# Altium PCB HT82V72_DEMOBOARD_V1_1.PcbDoc (part 2 of 2)
Units mil, origin at the board's own origin, x right, y up, seen from the top; angles counter-clockwise.
Board outline 2755.91 x 2047.24 mil, 4 copper layers (Top, 2-GND, 3-POWER, Bottom), stack 35.4 mil thick; 149 components, 103 nets, 424 pads, 256 vias.
Unrouted connection lines stored in the file: 3.
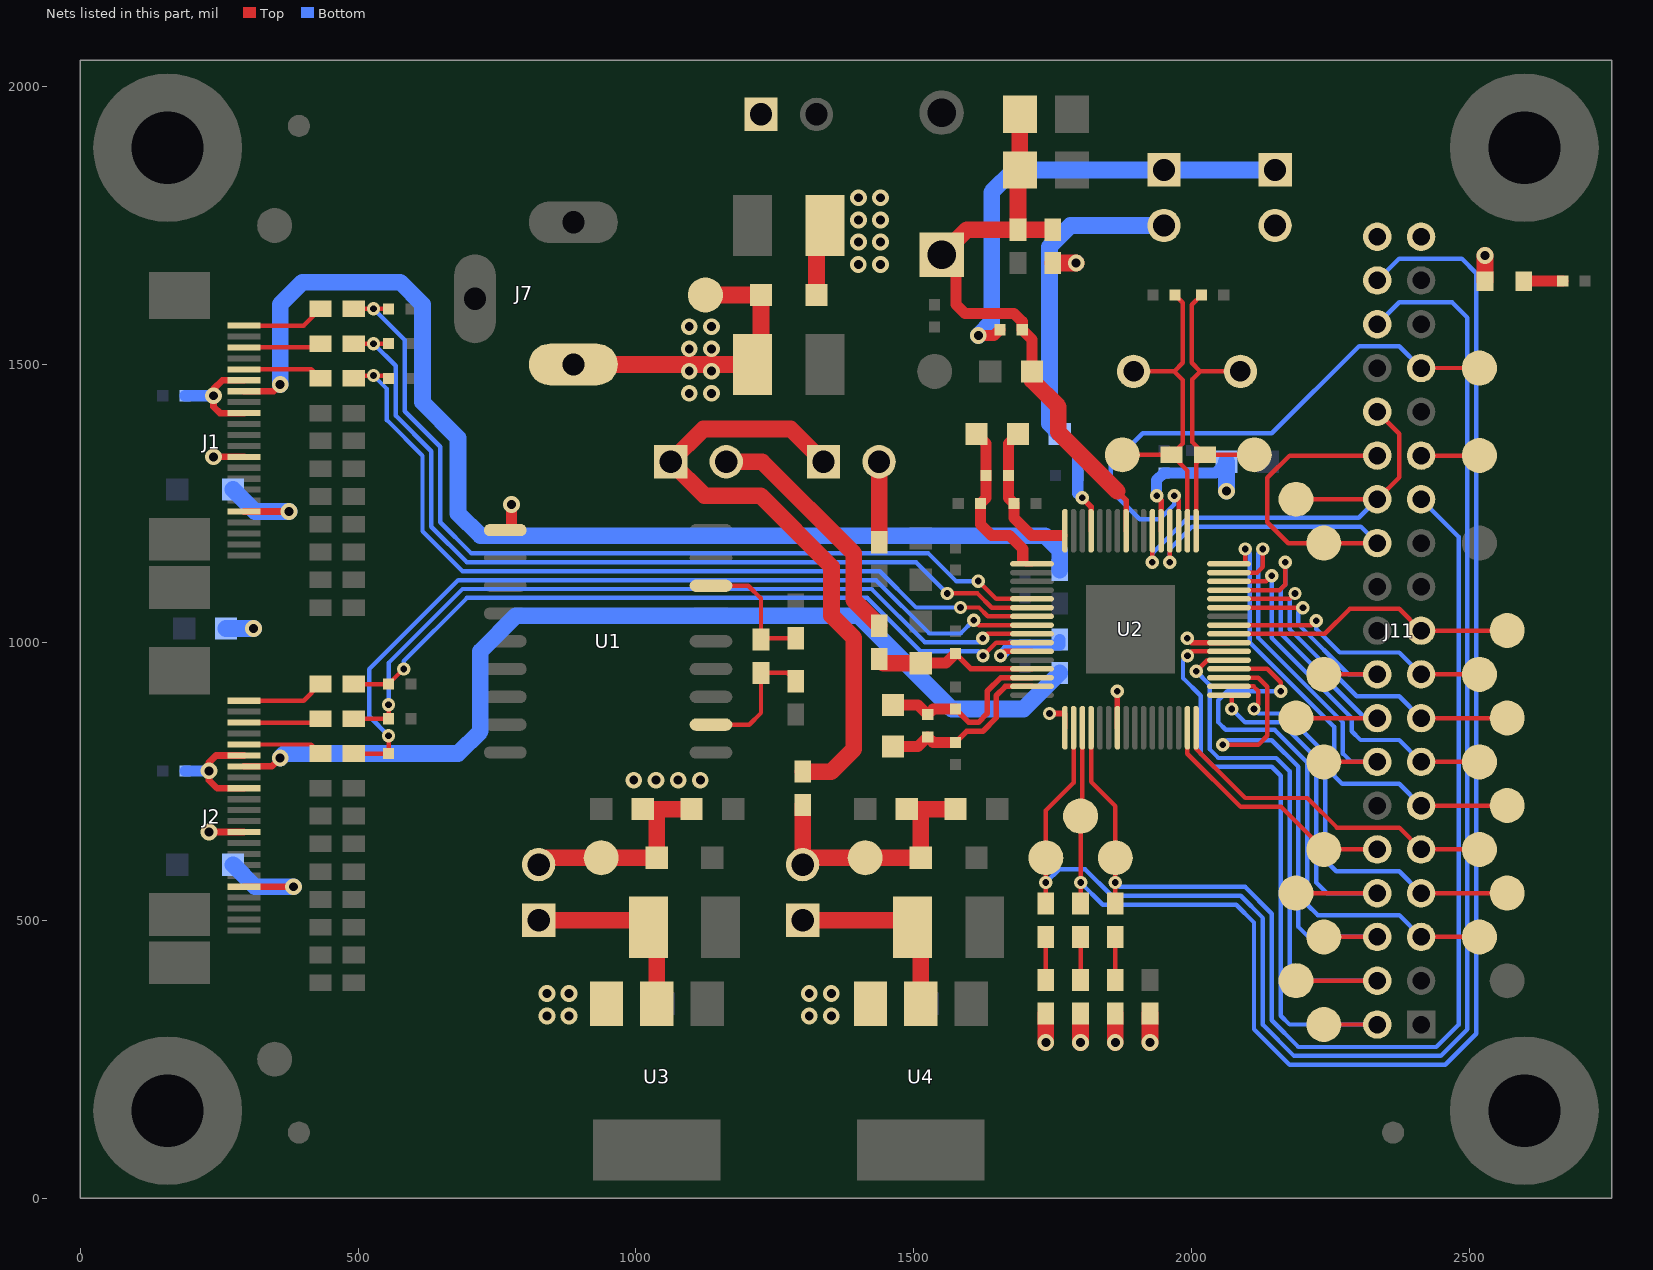
[diagram p4: the nets of this part, all layers, seen from the top]

## Via types
v1: diameter 24, hole 12, Top to Bottom, 140 vias
v2: diameter 30, hole 16, Top to Bottom, 116 vias

## Nets (pads, with @x,y where several pads share a name; then routed paths per layer and width w, separated by ;. In a path a pad name is that pad's centre, name@x,y a point inside that pad or via, vN(x,y) a via of type N, cw(c..) or ccw(c..) an arc to the next point about the centre after c; other vN are vias at no path point) (continued)
N16946003: C21.1 C22.1 L3.1 U2.61 | length 296.9
  Top w10: C22.1@1575,980 1602.72,952.28 U2.61@1712.6,952.28
  Top w20: C21.1@1512.5,962.6 1557.6,962.6 C22.1@1575,980
  Top w30: L3.1@1437.5,970 1444.9,962.6 C21.1@1512.5,962.6
N16948879: C7.2 C8.2 C9.1 U2.49 | length 308.6
  Top w10: 1696,1147 1701.74,1141.26 U2.49@1712.6,1141.26
  Top w20: C7.2@1612.6,1375 1630,1357.6 C8.2@1630,1300 1630,1260 C9.1@1620,1250 1620,1212 1640,1192 1672,1192 1696,1168 1696,1147
N16948881: C6.1 C7.1 C8.1 U2.48 | length 276.1
  Top w8: 1766.42,1191.97 1771.65,1191.97 U2.48@1771.65,1200.79
  Top w20: C7.1@1687.4,1375 1670,1357.6 C8.1@1670,1300 1670,1260 C6.1@1680,1250 1680,1224 1712.03,1191.97 1766.42,1191.97
N16949181: C10.1 C11.1 C12.1 U2.62 | length 328.2
  Top w10: C10.1@1575,880 1599,856 1616,856 1632,872 1632,912 1656.54,936.54 U2.62@1712.6,936.54
  Top w20: C11.1@1462.5,887.4 1507.6,887.4 C12.1@1525,870 1535,880 C10.1@1575,880
N16949187: C11.2 C12.2 C13.1 U2.63 | length 326.6
  Top w10: C13.1@1575,820 1595,840 1624,840 1648,864 1648,904 1664.79,920.79 U2.63@1712.6,920.79
  Top w20: C11.2@1462.5,812.6 1507.6,812.6 C12.2@1525,830 1535,820 C13.1@1575,820
N16949961: C18.1 R13.1 U2.59 | length 184.4
  Top w10: v1(1656,975.78) 1664,983.78 U2.59@1712.6,983.78
  Bottom w20: v1(1656,975.78) 1675.22,995 C18.1@1700,995 1762.5,995 R13.1@1762.5,1005
N16958578: LED1.2 R34.1 | length 70
  Top w20: LED1.2@2597.5,1650 R34.1@2667.5,1650
N16977037: J6.2 L3.2 | length 446.7
  Top w30: J6.2@1162.5,1325 1227,1325 1392,1160 1392,1075.5 L3.2@1437.5,1030
N16977040: J4.2 L2.2 | length 145
  Top w30: L2.2@1437.5,1180 J4.2@1437.5,1325
N16987505: R24.1 R33.2 | length 77.5
  Top w8: R24.1@1862.5,392.5 R33.2@1862.5,470
N16987621: R26.1 R31.2 | length 77.5
  Top w8: R26.1@1737.5,392.5 R31.2@1737.5,470
N16987626: R25.1 R32.2 | length 77.5
  Top w8: R25.1@1800,392.5 R32.2@1800,470
N16990104: C40.1 J8.1 U3.2 | length 355.2
  Top w30: J8.1@825,500 1010,500 C40.1@1022.5,487.5 1037.5,487.5 U3.2@1037.5,350
N16992961: J11.27 TP15.1 | length 129.7
  Top w8: J11.27@2412.5,1336.12 2529.87,1336.12 TP15.1@2517.5,1336.25
N16994401: C43.1 J10.1 U4.2 | length 362.5
  Top w30: J10.1@1300,500 1497.5,500 C43.1@1497.5,487.5 1512.5,487.5 U4.2@1512.5,350
N16995313: C32.1 R27.1 TP10.1 U2.33 Y1.1 | length 620.4
  Top w8: U2.33@2007.87,1200.79 2007.87,1321.62 R27.1@2023.75,1337.5 ; C32.1@2017.5,1625 2000,1607.5 2000,1503 2015.5,1487.5 ; Y1.1@2087.5,1487.5 2015.5,1487.5 ; TP10.1@2112.5,1337.5 R27.1@2023.75,1337.5 ; 2015.5,1487.5 2001.25,1473.25 2001.25,1360 R27.1@2023.75,1337.5
N16995318: C33.1 R27.2 TP11.1 U2.34 Y1.2 | length 624.9
  Top w8: TP11.1@1875,1337.5 R27.2@1963.75,1337.5 ; Y1.2@1895.37,1487.5 1968.5,1487.5 ; C33.1@1970,1625 1984,1611 1984,1503 1968.5,1487.5 ; U2.34@1992.13,1200.79 1992.13,1309.12 R27.2@1963.75,1337.5 ; R27.2@1963.75,1337.5 1984,1357.75 1984,1472 1968.5,1487.5
N17014977: R35.1 R37.1 U1.2 | length 239.4
  Top w8: U1.2@1135.04,851.97 1203.97,851.97 1225,873 R37.1@1225,945 1272.5,945 R35.1@1287.5,930
N17014985: R36.1 R37.2 U1.7 | length 237
  Top w8: U1.7@1135.04,1101.97 1202.03,1101.97 1225,1079 R37.2@1225,1005 1227.5,1007.5 R36.1@1287.5,1007.5
PVDD_3V3: C27.1 C29.1 C30.1 C31.1 J5.2 R23.1 R24.2 R25.2 R26.2 U2.7 U2.23 U2.37 | length 682.6
  Top w10: U2.7@1866.14,846.46 v1(1866.14,912) ; v1(1936.88,1264) 1944.88,1256 U2.37@1944.88,1200.79 ; v1(1992,1007.53) 2000,999.53 U2.23@2066.93,999.53
  Top w30: v2(1737.5,280) R26.2@1737.5,332.5 ; R23.1@1750,1682.5 v2(1792,1682.5) ; v2(1800,280) R25.2@1800,332.5 ; v2(1862.5,280) R24.2@1862.5,332.5 ; v2(1925,280) C27.1@1925,332.5
  Bottom w20: v1(1936.88,1264) 1936.88,1291.88 C31.1@1950,1305 C30.1@2000,1305 2042.6,1305 C29.1@2062.6,1325
  Bottom w30: v2(2062.6,1272) C29.1@2062.6,1325
PVDDREG_3V3: C25.1 C26.1 J3.2 U2.45 | length 764
  Top w10: v1(1802.9,1260) 1818.9,1244 U2.45@1818.9,1200.79
  Bottom w20: C25.1@1762.4,1375 1795,1342.4 C26.1@1795,1300 1795,1267.9 v1(1802.9,1260)
  Bottom w30: C25.1@1762.4,1375 1744,1393.4 1744,1712 1782,1750 J3.2@1950,1750
ROLLER_OUT: J11.25 R33.1 TP8.1 U2.4 | length 2177
  Top w8: U2.4@1818.9,846.46 1818.9,749.1 1862.5,705.5 TP8.1@1862.5,612.5 v1(1862.5,568) R33.1@1862.5,530
  Bottom w8: v1(1862.5,568) 1870.5,560 2096,560 2144,512 2144,320 2192,272 2440,272 2480,312 2480,1189.88 J11.25@2412.5,1257.38
RSTN: C24.1 C28.1 D2.1 D3.1 R14.2 R23.2 SW1.1 U2.41 | length 1112.9
  Top w10: 1865.89,1272 1881.89,1256 U2.41@1881.89,1200.79
  Top w20: SW1.1@1550,1697.05 1576,1671.05 1576,1608 1592,1592 1680,1592 1695,1577 R14.2@1695,1562.5 1712.4,1545.1 C24.1@1712.4,1487.5
  Top w30: SW1.1@1550,1697.05 1595.45,1742.5 C28.1@1687.5,1742.5 ; D3.1@1690.65,1950 D2.1@1690.65,1850 1687.5,1846.85 C28.1@1687.5,1742.5 ; C24.1@1712.4,1487.5 1712.4,1471.6 1760,1424 1760,1377.89 1865.89,1272 ; R23.2@1750,1742.5 C28.1@1687.5,1742.5
VCC_3V3: C3.1 C4.1 C5.1 C41.1 C45.1 C46.1 J1.6 J1.9 J2.6 J2.9 J3.1 J5.1 J8.2 R14.1 TP13.1 U2.1 | length 1750.2
  Top w10: v1(1744,872) 1771.65,872 U2.1@1771.65,846.46
  Top w12: J2.9@295,737.51 246.49,737.51 232,752 v2(232,768.75) 232,784 244.57,796.57 J2.6@295,796.57 ; J1.9@295,1412.51 251.49,1412.51 240,1424 v2(240,1443.75) 240,1455.57 256,1471.57 J1.6@295,1471.57
  Top w20: v2(1616,1552) 1644.5,1552 R14.1@1655,1562.5
  Top w30: J8.2@825,600 837.5,612.5 TP13.1@937.5,612.5 C41.1@1037.5,612.5 1037.5,700 ; C46.1@1012.4,700 1037.5,700 ; C45.1@1100.1,700 1037.5,700
  Bottom w20: C5.1@188.75,768.75 v2(232,768.75) ; C4.1@188.75,1443.75 v2(240,1443.75)
  Bottom w30: C3.1@262.4,1025 v2(312,1025) ; v2(1616,1552) 1640,1576 1640,1810 1680,1850 J3.1@1950,1850 J5.1@2150,1850
  other v2: 996.1,752.19 1036.07,752.19 1076.04,752.19 1116.01,752.19
VCC_3V3_AVDD: C44.1 C47.1 C48.1 J10.2 L1.2 TP14.1 | length 500.4
  Top w30: L1.2@1300,707.5 J10.2@1300,600 1312.5,612.5 TP14.1@1412.5,612.5 C44.1@1512.5,612.5 1512.5,700 ; C48.1@1487.4,700 1512.5,700 ; C47.1@1575.1,700 1512.5,700
VCC_3V3A: J4.1 J6.1 L1.1 | length 1145
  Top w30: L1.1@1300,767.5 1351.5,767.5 1392,808 1392,1008 1352,1048 1352,1136 1224,1264 1123.5,1264 J6.1@1062.5,1325 1121.5,1384 1278.5,1384 J4.1@1337.5,1325
VCC_5V: C1.2 C2.2 C37.1 C38.1 C42.1 D1.1 J1.13 J1.18 J2.13 J2.18 J11.37 J11.38 LED1.1 U1.10 U3.3 U4.3 | length 765.1
  Top w12: v2(232,658.77) J2.13@295,658.77 ; v2(240,1333.77) J1.13@295,1333.77 ; J2.18@295,560.35 v2(384,560.35) ; J1.18@295,1235.35 v2(376,1235.35)
  Top w20: U1.10@764.96,1201.97 776,1201.97 v2(776,1248)
  Top w30: D1.1@1325,1625 1325,1735 C37.1@1340,1750 ; LED1.1@2527.5,1650 v2(2527.5,1696)
  Bottom w30: C2.2@275,600 314.65,560.35 v2(384,560.35) ; C1.2@275,1275 314.65,1235.35 v2(376,1235.35)
  other v2: 839.9,327.85 879.72,327.85 1311.76,327.85 1351.59,327.85 839.9,368.27 879.72,368.27 1311.76,368.27 1351.59,368.27 1400.16,1679.98 1439.99,1679.98 1400.3,1720.19 1440.12,1720.19 1400.3,1760.02 1440.12,1760.02 1400.3,1799.84 1440.12,1799.84
VCC_5V_UV: C39.1 D1.2 J7.1 J9.1 TP12.1 | length 562.5
  Top w30: J7.1@887.5,1500 C39.1@1210,1500 1225,1500 D1.2@1225,1625 TP12.1@1125,1625
  other v2: 1096,1448 1136,1448 1096,1488 1136,1488 1096,1528 1136,1528 1096,1568 1136,1568
VIN1_A: C15.1 R10.1 U2.53 | length 1617.9
  Top w8: R10.1@492.5,1600 v1(528,1600) C15.1@555,1600 ; v1(1616,1110.27) 1648,1078.27 U2.53@1712.6,1078.27
  Bottom w8: v1(528,1600) 584,1544 584,1416 648,1352 648,1216 704,1160 1526.27,1160 1576,1110.27 v1(1616,1110.27)
VIN1_B: C34.1 R28.1 U2.58 | length 1345.3
  Top w8: R28.1@492.5,925 C34.1@555,925 v1(582,952) ; v1(1624.47,976) 1648,999.53 U2.58@1712.6,999.53
  Bottom w8: v1(582,952) 582,966 696,1080 1416,1080 1512,984 1616.47,984 v1(1624.47,976)
VIN1A: J1.1 R10.2 | length 149.9
  Top w8: J1.1@295,1569.99 402.49,1569.99 R10.2@432.5,1600
VIN1B: J2.1 R28.2 | length 149.9
  Top w8: J2.1@295,894.99 402.49,894.99 R28.2@432.5,925
VIN2_A: C16.1 R11.1 U2.54 | length 1575.9
  Top w8: R11.1@492.5,1537.5 v1(528,1537.5) C16.1@555,1537.5 ; v1(1560,1088) 1614.52,1088 1640,1062.52 U2.54@1712.6,1062.52
  Bottom w8: v1(528,1537.5) 568,1497.5 568,1408 632,1344 632,1208 696,1144 1504,1144 v1(1560,1088)
VIN2_B: C35.1 R29.1 U2.57 | length 1421.8
  Top w8: R29.1@492.5,862.5 C35.1@555,862.5 v1(555,888) ; v1(1624,1007.28) 1632,1015.28 U2.57@1712.6,1015.28
  Bottom w8: v1(555,888) 555,963 688,1096 1424,1096 1520,1000 1616.72,1000 v1(1624,1007.28)
VIN2A: J1.3 R11.2 | length 144.4
  Top w8: J1.3@295,1530.62 432.5,1530.62 R11.2@432.5,1537.5
VIN2B: J2.3 R29.2 | length 144.4
  Top w8: J2.3@295,855.62 432.5,855.62 R29.2@432.5,862.5
VIN3_A: C17.1 R12.1 U2.55 | length 1546.1
  Top w8: R12.1@492.5,1475 492.5,1480 v1(528,1480) 550,1480 C17.1@555,1475 ; v1(1584,1062.77) 1617.23,1062.77 1633.23,1046.77 U2.55@1712.6,1046.77
  Bottom w8: v1(528,1480) 552,1456 552,1400 616,1336 616,1200 688,1128 1438.77,1128 1504,1062.77 v1(1584,1062.77)
VIN3_B: C36.1 R30.1 U2.56 | length 1542.5
  Top w8: R30.1@492.5,800 552,800 553.5,801.5 C36.1@555,800 v1(555,832) ; v1(1608,1040) 1616.98,1031.02 U2.56@1712.6,1031.02
  Bottom w8: v1(555,832) 520,867 520,952 680,1112 1432,1112 1528,1016 1584,1016 v1(1608,1040)
VIN3A: J1.5 R12.2 | length 144.2
  Top w8: J1.5@295,1491.25 416.25,1491.25 R12.2@432.5,1475
VIN3B: J2.5 R30.2 | length 144.2
  Top w8: J2.5@295,816.25 416.25,816.25 R30.2@432.5,800
VREFA: J1.7 R9.2 | length 2051.2
  Top w12: J1.7@295,1451.88 347.88,1451.88 v2(360,1464)
  Bottom w30: v2(360,1464) 360,1608 400,1648 576,1648 616,1608 616,1432 680,1368 680,1232 720,1192 1736,1192 1762.5,1165.5 R9.2@1762.5,1130
VREFB: J2.7 R13.2 | length 1760.7
  Top w12: J2.7@295,776.88 344.88,776.88 v2(360,792)
  Bottom w30: v2(360,792) 368,800 680,800 720,840 720,984 784,1048 1400,1048 1568,880 1697.5,880 R13.2@1762.5,945
X00001: J11.24 J11.28 TP2.1 U2.36 | length 990.3
  Top w8: v1(1960.63,1144) U2.36@1960.63,1200.79 ; J11.24@2333.76,1178.64 2250.05,1178.64 TP2.1@2237.5,1178.59 2173.41,1178.59 2136,1216 2136,1296 2176.12,1336.12 J11.28@2333.76,1336.12
  Bottom w8: v1(1960.63,1144) 1960.63,1168 2000.63,1208 2304.4,1208 J11.24@2333.76,1178.64
X00010: J11.2 TP18.1 U2.22 | length 1139.1
  Top w8: v1(1992.22,976) 2000,983.78 U2.22@2066.93,983.78 ; TP18.1@2237.5,312.42 2250.08,312.5 J11.2@2333.76,312.5
  Bottom w8: v1(1992.22,976) 1984.22,968 1984.22,935.78 2016,904 2016,800 2040,776 2144,776 2160,760 2160,328.5 2176,312.5 J11.2@2333.76,312.5
X00011: J11.4 TP19.1 U2.21 | length 1049.1
  Top w8: v1(2008,948) 2028.03,968.03 U2.21@2066.93,968.03 ; TP19.1@2187.5,391.47 2200.23,391.24 J11.4@2333.76,391.24
  Bottom w8: v1(2008,948) 2032,924 2032,808 2048,792 2152,792 2176,768 2176,407.24 2192,391.24 J11.4@2333.76,391.24
X00012: J11.5 TP20.1 U2.20 | length 1082
  Top w8: U2.20@2066.93,952.28 2135.72,952.28 2160,928 v1(2160,912) ; J11.5@2412.5,469.98 2529.93,469.98 TP20.1@2517.5,469.91
  Bottom w8: v1(2160,912) 2064,912 2048,896 2048,856 2061,843 2149,843 2208,784 2208,528 2226.65,509.35 2373.13,509.35 J11.5@2412.5,469.98
X00013: J11.6 TP21.1 U2.19 | length 943.2
  Top w8: v1(2056,816) 2120,816 2136,832 2136,920 2119.46,936.54 U2.19@2066.93,936.54 ; TP21.1@2237.5,469.91 2250.07,469.98 J11.6@2333.76,469.98
  Bottom w8: v1(2056,816) 2064,824 2144,824 2192,776 2192,488 2210.02,469.98 J11.6@2333.76,469.98
X00014: J11.7 TP22.1 U2.18 | length 821.7
  Top w8: U2.18@2066.93,920.79 2111.21,920.79 2120,912 2120,888 v1(2112,880) ; J11.7@2412.5,548.72 2579.76,548.72 TP22.1@2567.5,548.96
  Bottom w8: v1(2112,880) 2120,872 2168,872 2240,800 2240,608 2259.91,588.09 2373.13,588.09 J11.7@2412.5,548.72
X00015: J11.8 TP23.1 U2.17 | length 706.6
  Top w8: U2.17@2066.93,905.04 2072,905.04 v1(2072,880) ; TP23.1@2187.5,548.96 2200.24,548.72 J11.8@2333.76,548.72
  Bottom w8: v1(2072,880) 2096,856 2160,856 2224,792 2224,568 2243.28,548.72 J11.8@2333.76,548.72
X00016: J11.9 TP24.1 U2.16 | length 647.7
  Top w8: U2.16@2007.87,846.46 2007.87,808.13 2096,720 2208,720 2261.17,666.83 2373.13,666.83 J11.9@2412.5,627.46 2529.94,627.46 TP24.1@2517.5,627.4
X00017: J11.10 TP25.1 U2.15 | length 459.7
  Top w8: U2.15@1992.13,846.46 1992.13,799.87 2088,704 2160.9,704 TP25.1@2237.5,627.4 2250.06,627.46 J11.10@2333.76,627.46
X00018: J11.11 TP26.1 U2.32 | length 888.4
  Top w8: U2.32@2066.93,1141.26 2096,1141.26 v1(2096,1168) ; J11.11@2412.5,706.2 2579.75,706.2 TP26.1@2567.5,706.45
  Bottom w8: v1(2096,1168) 2104,1160 2104,1000 2256,848 2256,760 2270.43,745.57 2373.13,745.57 J11.11@2412.5,706.2
X00019: J11.14 TP27.1 U2.31 | length 695.9
  Top w8: U2.31@2066.93,1125.51 2117.51,1125.51 2128,1136 v1(2128,1168) ; TP27.1@2237.5,784.89 2250.05,784.94 J11.14@2333.76,784.94
  Bottom w8: v1(2128,1168) 2120,1160 2120,1008 2272,856 2272,800 2287.06,784.94 J11.14@2333.76,784.94
X00020: J11.13 TP28.1 U2.30 | length 698.2
  Top w8: U2.30@2066.93,1109.76 2133.76,1109.76 v1(2144,1120) ; J11.13@2412.5,784.94 2529.95,784.94 TP28.1@2517.5,784.89
  Bottom w8: v1(2144,1120) 2144,1008 2288,864 2288,840 2303.69,824.31 2373.13,824.31 J11.13@2412.5,784.94
X00021: J11.16 TP29.1 U2.29 | length 659.6
  Top w8: U2.29@2066.93,1094.02 2158.02,1094.02 2168,1104 v1(2168,1144) ; TP29.1@2187.5,863.94 2200.26,863.68 J11.16@2333.76,863.68
  Bottom w8: v1(2168,1144) 2168,1104 2160,1096 2160,1016 2312.32,863.68 J11.16@2333.76,863.68
X00022: J11.15 TP30.1 U2.28 | length 673.3
  Top w8: U2.28@2066.93,1078.27 2176,1078.27 v1(2185.73,1088) ; J11.15@2412.5,863.68 2579.74,863.68 TP30.1@2567.5,863.94
  Bottom w8: v1(2185.73,1088) 2176,1078.27 2176,1024 2296.95,903.05 2373.13,903.05 J11.15@2412.5,863.68
X00023: J11.18 TP31.1 U2.27 | length 442
  Top w8: U2.27@2066.93,1062.52 v1(2200,1062.52) ; TP31.1@2237.5,942.38 2250,942.42 J11.18@2333.76,942.42
  Bottom w8: v1(2200,1062.52) 2192,1054.52 2192,1032 2281.58,942.42 J11.18@2333.76,942.42
X00024: J11.17 TP32.1 U2.25 | length 527.6
  Top w8: U2.25@2066.93,1031.02 2216,1031.02 v1(2224,1039.02) ; J11.17@2412.5,942.42 2529.96,942.42 TP32.1@2517.5,942.38
  Bottom w8: v1(2224,1039.02) 2224,1024 2266.21,981.79 2373.13,981.79 J11.17@2412.5,942.42
X00025: J11.19 TP33.1 U2.24 | length 560.1
  Top w8: U2.24@2066.93,1015.28 2239.28,1015.28 2284.53,1060.53 2373.13,1060.53 J11.19@2412.5,1021.16 2579.73,1021.16 TP33.1@2567.5,1021.43
X00028: J11.34 R31.1 TP6.1 U2.2 | length 2847.1
  Top w8: R31.1@1737.5,530 v1(1737.5,568) TP6.1@1737.5,612.5 1737.5,697.5 1787.4,747.4 U2.2@1787.4,846.46
  Bottom w8: v1(1737.5,568) 1761.5,592 1808,592 1856,544 2088,544 2128,504 2128,312 2184,256 2448,256 2496,304 2496,1584 2468.29,1611.71 2373.13,1611.71 J11.34@2333.76,1572.34
X00029: J11.36 R32.1 TP7.1 U2.3 | length 2874.8
  Top w8: R32.1@1800,530 v1(1800,568) TP7.1@1800,687.5 1803.15,690.65 U2.3@1803.15,846.46
  Bottom w8: v1(1800,568) 1840,528 2080,528 2112,496 2112,304 2176,240 2456,240 2512,296 2512,1664 2485.55,1690.45 2373.13,1690.45 J11.36@2333.76,1651.08
X00030: J11.31 TP1.1 U2.35 | length 1067
  Top w8: v1(1968.38,1264) 1976.38,1256 U2.35@1976.38,1200.79 ; J11.31@2412.5,1493.6 2529.85,1493.6 TP1.1@2517.5,1493.45
  Bottom w8: v1(1968.38,1264) 1968.38,1248 1941.9,1221.53 1906.47,1221.53 1854.14,1273.86 1854.14,1318.14 1912,1376 2144,1376 2300.97,1532.97 2373.13,1532.97 J11.31@2412.5,1493.6
X00089: J11.26 J11.30 TP3.1 U2.38 | length 854.1
  Top w8: v1(1929.13,1144) U2.38@1929.13,1200.79 ; TP3.1@2187.5,1257.42 2200.04,1257.38 J11.26@2333.76,1257.38 2373.13,1296.75 2373.13,1375.49 J11.30@2333.76,1414.86
  Bottom w8: v1(1929.13,1144) 1929.13,1160 1993.13,1224 2300.38,1224 J11.26@2333.76,1257.38
pads on no net: ID1.1 ID2.1 ID3.1 J1._ J1._/2 J1._/3 J2._ J2._/2 J2._/3 M1.1 M2.1 M3.1 M4.1 U3.4 U4.4

## Polygon pours and split planes (outlines as drawn)
GND on Top "Top-GND" (solid, remove dead copper, pour order 0): 2744.91,2023.64 2732.31,2036.24 23.6,2036.24 11,2023.64 11,23.6 23.6,11 2732.31,11 2744.91,23.6
GND on Bottom "Bottom-GND" (solid, remove dead copper, pour order 2): 2744.91,2023.64 2732.31,2036.24 23.6,2036.24 11,2023.64 11,23.6 23.6,11 2732.31,11 2744.91,23.6
GND on 2-GND (split plane): 2740.83,2021.95 2740.83,25.29 2730.62,15.08 25.29,15.08 15.08,25.29 15.08,2021.95 25.29,2032.17 2730.62,2032.17
VCC_5V_UV on 3-POWER (split plane): 1258.42,2023.31 1258.42,1426.69 1248.31,1416.58 664.19,1416.58 654.08,1426.69 654.08,2023.31 664.19,2033.42 1248.31,2033.42
PVDD_3V3 on 3-POWER (split plane): 2208.42,1773.31 2208.42,239.19 2198.31,229.08 1714.19,229.08 1704.08,239.19 1704.08,423.31 1714.19,433.42 1800,433.42 1801.56,433.73 1802.88,434.62 1815.38,447.12 1815.83,447.78 1816.27,448.44 1816.58,450 1816.58,1137.5 1816.27,1139.06 1815.83,1139.72 1815.38,1140.38 1802.88,1152.88 1801.56,1153.77 1800,1154.08 1726.69,1154.08 1716.58,1164.19 1716.58,1773.31 1726.69,1783.42 2198.31,1783.42
VCC_3V3 on 3-POWER (split plane): 620.92,2023.31 620.92,1025 621.23,1023.44 622.12,1022.12 634.62,1009.62 635.28,1009.17 635.94,1008.73 637.5,1008.42 1437.5,1008.42 1439.06,1008.73 1440.38,1009.62 1452.88,1022.12 1453.33,1022.78 1453.77,1023.44 1454.08,1025 1454.08,1773.31 1464.19,1783.42 1673.31,1783.42 1683.42,1773.31 1683.42,1137.5 1683.73,1135.94 1684.62,1134.62 1697.12,1122.12 1697.78,1121.67 1698.44,1121.23 1700,1120.92 1773.31,1120.92 1783.42,1110.81 1783.42,476.69 1773.31,466.58 426.69,466.58 416.58,476.69 416.58,700 416.27,701.56 415.83,702.22 415.38,702.88 402.88,715.38 401.56,716.27 400,716.58 226.69,716.58 216.58,726.69 216.58,1060.81 226.69,1070.92 400,1070.92 401.56,1071.23 402.88,1072.12 415.38,1084.62 415.83,1085.28 416.27,1085.94 416.58,1087.5 416.58,1375 416.27,1376.56 415.83,1377.22 415.38,1377.88 402.88,1390.38 401.56,1391.27 400,1391.58 26.69,1391.58 16.58,1401.69 16.58,2023.31 26.69,2033.42 610.81,2033.42
VCC_5V on 3-POWER (split plane): 2745.82,2023.41 2745.82,26.59 2735.81,16.58 26.69,16.58 16.58,26.69 16.58,1348.31 26.69,1358.42 373.31,1358.42 383.42,1348.31 383.42,1114.19 373.31,1104.08 200,1104.08 198.44,1103.77 197.78,1103.33 197.12,1102.88 184.62,1090.38 183.73,1089.06 183.42,1087.5 183.42,700 183.73,698.44 184.62,697.12 197.12,684.62 197.78,684.17 198.44,683.73 200,683.42 373.31,683.42 383.42,673.31 383.42,450 383.73,448.44 384.62,447.12 397.12,434.62 397.78,434.17 398.44,433.73 400,433.42 1660.81,433.42 1670.92,423.31 1670.92,212.5 1671.23,210.94 1672.12,209.62 1684.62,197.12 1685.28,196.67 1685.94,196.23 1687.5,195.92 2225,195.92 2226.56,196.23 2227.88,197.12 2240.38,209.62 2240.83,210.28 2241.27,210.94 2241.58,212.5 2241.58,1800 2241.27,1801.56 2240.83,1802.22 2240.38,1802.88 2227.88,1815.38 2226.56,1816.27 2225,1816.58 1437.5,1816.58 1435.94,1816.27 1435.28,1815.83 1434.62,1815.38 1422.12,1802.88 1421.23,1801.56 1420.92,1800 1420.92,1051.69 1410.81,1041.58 664.19,1041.58 654.08,1051.69 654.08,1373.31 664.19,1383.42 1275,1383.42 1276.56,1383.73 1277.88,1384.62 1290.38,1397.12 1290.83,1397.78 1291.27,1398.44 1291.58,1400 1291.58,2023.31 1301.69,2033.42 2735.81,2033.42

## Keep-outs
Keep-Out Layer:
  the board outline again, w10

## Other copper
Top:
  pour cut-out: 887.5,287.5 1187.5,287.5 1187.5,162.5 887.5,162.5 887.5,287.5
  pour cut-out: 1362.5,287.5 1662.5,287.5 1662.5,162.5 1362.5,162.5 1362.5,287.5
  region net VCC_5V_UV: 800,1651.5 812.5,1664 1251.5,1664 1264,1651.5 1264,1436.5 1251.5,1424 812.5,1424 800,1436.5 800,1651.5
  region net VCC_5V: 976,387.5 963.5,400 828.5,400 816,387.5 816,316.5 828.5,304 963.5,304 976,316.5 976,387.5
  region net VCC_5V: 1448,387.5 1435.5,400 1300.5,400 1288,387.5 1288,316.5 1300.5,304 1435.5,304 1448,316.5 1448,387.5
  region net GND: 755.5,1424 768,1436.5 768,1683.5 780.5,1696 1251.5,1696 1264,1708.5 1264,1811.5 1251.5,1824 596.5,1824 584,1811.5 584,1436.5 596.5,1424 755.5,1424
  region net N16990104: 1055.5,304 1068,316.5 1068,523.5 1055.5,536 796.5,536 784,523.5 784,468.5 796.5,456 991.5,456 1004,443.5 1004,316.5 1016.5,304 1055.5,304
  region net VCC_3V3: 796.5,568 784,580.5 784,643.5 796.5,656 979.5,656 992,668.5 992,755.5 1004.5,768 1107.5,768 1120,755.5 1120,684.5 1107.5,672 1076.5,672 1064,659.5 1064,580.5 1051.5,568 796.5,568
  region net VCC_3V3_AVDD: 1256,580.5 1268.5,568 1531.5,568 1544,580.5 1544,643.5 1556.5,656 1587.5,656 1600,668.5 1600,715.5 1587.5,728 1476.5,728 1464,715.5 1464,668.5 1451.5,656 1340.5,656 1328,668.5 1328,715.5 1315.5,728 1268.5,728 1256,715.5 1256,580.5
  region net N16994401: 1531.5,304 1544,316.5 1544,523.5 1531.5,536 1268.5,536 1256,523.5 1256,468.5 1268.5,456 1467.5,456 1480,443.5 1480,316.5 1492.5,304 1531.5,304
  region net VCC_5V: 1296,1811.5 1308.5,1824 1451.5,1824 1464,1811.5 1464,1596.5 1451.5,1584 1308.5,1584 1296,1596.5 1296,1811.5
  text "ARTWORK-TOP" at 2393.8,-387.5 h50
Bottom:
  region net VCC_5V: 1288,387.5 1300.5,400 1435.5,400 1448,387.5 1448,316.5 1435.5,304 1300.5,304 1288,316.5 1288,387.5
  region net VCC_5V: 816,387.5 828.5,400 963.5,400 976,387.5 976,316.5 963.5,304 828.5,304 816,316.5 816,387.5
  text "ARTWORK-BOTTOM" at 2275,-387.5 h50
2-GND (plane layer: these items are gaps in the copper):
  region: 2755.91,0 0,0 0,2047.24 2755.91,2047.24 hole: 2732.31,2036.24 23.6,2036.24 11,2023.64 11,23.6 23.6,11 2732.31,11 2744.91,23.6 2744.91,2023.64
  lines w8: 11,23.6 11,2023.64 23.6,2036.24 2732.31,2036.24 2744.91,2023.64 2744.91,23.6 2732.31,11 23.6,11 11,23.6
  text "LAYER-2" at 2500,-387.5 h50
3-POWER (plane layer: these items are gaps in the copper):
  region: 2755.91,0 0,0 0,2047.24 2755.91,2047.24 hole: 1250,2037.5 662.5,2037.5 650,2025 650,1425 662.5,1412.5 1250,1412.5 1262.5,1425 1262.5,2025 hole: 612.5,2037.5 25,2037.5 12.5,2025 12.5,1400 25,1387.5 400,1387.5 412.5,1375 412.5,1087.5 400,1075 225,1075 212.5,1062.5 212.5,725 225,712.5 400,712.5 412.5,700 412.5,475 425,462.5 1775,462.5 1787.5,475 1787.5,1112.5 1775,1125 1700,1125 1687.5,1137.5 1687.5,1775 1675,1787.5 1462.5,1787.5 1450,1775 1450,1025 1437.5,1012.5 637.5,1012.5 625,1025 625,2025 hole: 2200,1787.5 1725,1787.5 1712.5,1775 1712.5,1162.5 1725,1150 1800,1150 1812.5,1137.5 1812.5,450 1800,437.5 1712.5,437.5 1700,425 1700,237.5 1712.5,225 2200,225 2212.5,237.5 2212.5,1775 hole: 2737.5,2037.5 1300,2037.5 1287.5,2025 1287.5,1400 1275,1387.5 662.5,1387.5 650,1375 650,1050 662.5,1037.5 1412.5,1037.5 1425,1050 1425,1800 1437.5,1812.5 2225,1812.5 2237.5,1800 2237.5,212.5 2225,200 1687.5,200 1675,212.5 1675,425 1662.5,437.5 400,437.5 387.5,450 387.5,675 375,687.5 200,687.5 187.5,700 187.5,1087.5 200,1100 375,1100 387.5,1112.5 387.5,1350 375,1362.5 25,1362.5 12.5,1350 12.5,25 25,12.5 2737.5,12.5 2750,25 2750,2025
  lines w8: 12.5,25 25,12.5 2737.5,12.5 2750,25 2750,2025 2737.5,2037.5 1300,2037.5 1287.5,2025 1287.5,1400 1275,1387.5 662.5,1387.5 650,1375 650,1050 662.5,1037.5 1412.5,1037.5 1425,1050 1425,1800 1437.5,1812.5 2225,1812.5 2237.5,1800 2237.5,212.5 2225,200 1687.5,200 1675,212.5 1675,425 1662.5,437.5 400,437.5 387.5,450 387.5,675 375,687.5 200,687.5 187.5,700 187.5,1087.5 200,1100 375,1100 387.5,1112.5 387.5,1350 375,1362.5 25,1362.5 12.5,1350 12.5,25 ; 12.5,1400 25,1387.5 400,1387.5 412.5,1375 412.5,1087.5 400,1075 225,1075 212.5,1062.5 212.5,725 225,712.5 400,712.5 412.5,700 412.5,475 425,462.5 1775,462.5 1787.5,475 1787.5,1112.5 1775,1125 1700,1125 1687.5,1137.5 1687.5,1775 1675,1787.5 1462.5,1787.5 1450,1775 1450,1025 1437.5,1012.5 637.5,1012.5 625,1025 625,2025 612.5,2037.5 25,2037.5 12.5,2025 12.5,1400 ; 650,1425 650,2025 662.5,2037.5 1250,2037.5 1262.5,2025 1262.5,1425 1250,1412.5 662.5,1412.5 650,1425 ; 1700,237.5 1700,425 1712.5,437.5 1800,437.5 1812.5,450 1812.5,1137.5 1800,1150 1725,1150 1712.5,1162.5 1712.5,1775 1725,1787.5 2200,1787.5 2212.5,1775 2212.5,237.5 2200,225 1712.5,225 1700,237.5
  text "LAYER-3" at 2500,-387.5 h50
Multi-Layer:
  lines w10: -1075,-425 575,-425 ; -1075,-287.5 575,-287.5 ; -250,-575 -250,-125 ; 1702.5,-573.23 1702.5,-128.23 ; 1702.5,-425 3180,-425 ; 1702.5,-275 3180,-275 ; 2255,-570 2255,-130 ; 2745,-570 2745,-425 ; 575,-575 3180,-575 ; 575,-575 575,-125 ; 575,-575 -1075,-575 -1075,-125 575,-125 ; 575,-575 575,-125 ; 575,-125 3180,-125 3180,-575 ; 3180,-575 -8020,-575 -8020,7225 3180,7225 3180,-575
  text "蔼ひм()そ" at 775,-220 h50
  text "Clearance  Check" at -1025,-237.5 h50
  text "JOB NAME" at 1755,-237.5 h50
  text "HT82V72A_DEMOBOARD" at 2287.5,-237.5 h45
  text "False error : 0000" at -212.5,-250 h50
  text "Gao-Fu Technology Corp." at 660,-330 h50
  text "Connectivity Check" at -1050,-387.5 h50
  text "False error : 0000" at -212.5,-387.5 h50
  text "LAYER" at 1842.5,-387.5 h50
  text "http://www.gaofu.com.tw" at 765,-430 h40
  text "Plane Check" at -912.5,-537.5 h50
  text "False error : 0000" at -212.5,-537.5 h50
  text "DATE" at 1867.5,-537.5 h50
  text "2016.11.21" at 2325,-537.5 h50
  text "4 LAYER-A4" at 2762.5,-537.5 h40
  text "886-3-6682475" at 920,-540 h40

## Silkscreen, mask and mechanical layers (free items; w line width, h text height)
Silkscreen Top:
  text "Reset" at 1425,2025 h30 r270
  text "+5V_IN" at 1187.5,1850 h30
  text "+5V_IN" at 712.5,1400 h30
  text "DVDD" at 837.5,287.5 h30 r270
  text "AVDD" at 1312.5,287.5 h30 r270
  text "SILKSCREEN-TOP" at 2318.8,-387.5 h50
Silkscreen Bottom:
  text "SILKSCREEN-BTM" at 3131.3,-387.5 h50
Paste Mask Top:
  text "SMD Paste Mask-TOP" at 2360,-380 h40
Paste Mask Bottom:
  text "SMD Paste Mask-BTM" at 2356.3,-375 h40
Solder Mask Top:
  text "SOLDER MASK-TOP" at 2293.8,-387.5 h50
Solder Mask Bottom:
  text "SOLDER MASK-BTM" at 3156.3,-387.5 h50
Assembly Drawing Bottom:
  text "Rachel" at 605,-550 h50
Drill Drawing:
  lines w1: 0,2047.24 0.03,2047.24 ; 2755.91,0 2755.93,0 ; 2755.91,2047.24 2755.93,2047.24 2755.91,2047.24
  lines w10: 0,2097.24 0,2175.98 ; 1192.27,2125.98 0,2125.98 ; 1563.63,2125.98 2755.91,2125.98 ; 2755.91,2097.24 2755.91,2175.98 ; 2805.91,0 3002.76,0 ; 2805.91,2047.24 3002.76,2047.24 ; 2952.76,956.12 2952.76,0 ; 2952.76,1091.12 2952.76,2047.24 ; 0,2125.98 100,2150.98 100,2100.98 0,2125.98 ; 2755.91,2125.98 2655.91,2100.98 2655.91,2150.98 2755.91,2125.98 ; 2952.76,0 2927.76,100 2977.76,100 2952.76,0 ; 2952.76,2047.24 2977.76,1947.24 2927.76,1947.24 2952.76,2047.24
  text "70.0mm" at 1222.27,2088.48 h50
  text "52.0mm" at 2795.94,986.12 h50
  text "DRILL DRAWING" at 2368.8,-387.5 h50